# Altium PCB PCB1.PcbDoc
Units mm, origin at the board's own origin, x right, y up, seen from the top; angles counter-clockwise.
Board outline 65.91 x 43.31 mm, 2 copper layers (Top Layer, Bottom Layer); 32 components, 60 nets, 227 pads, 68 vias.
Unrouted connection lines stored in the file: 41.
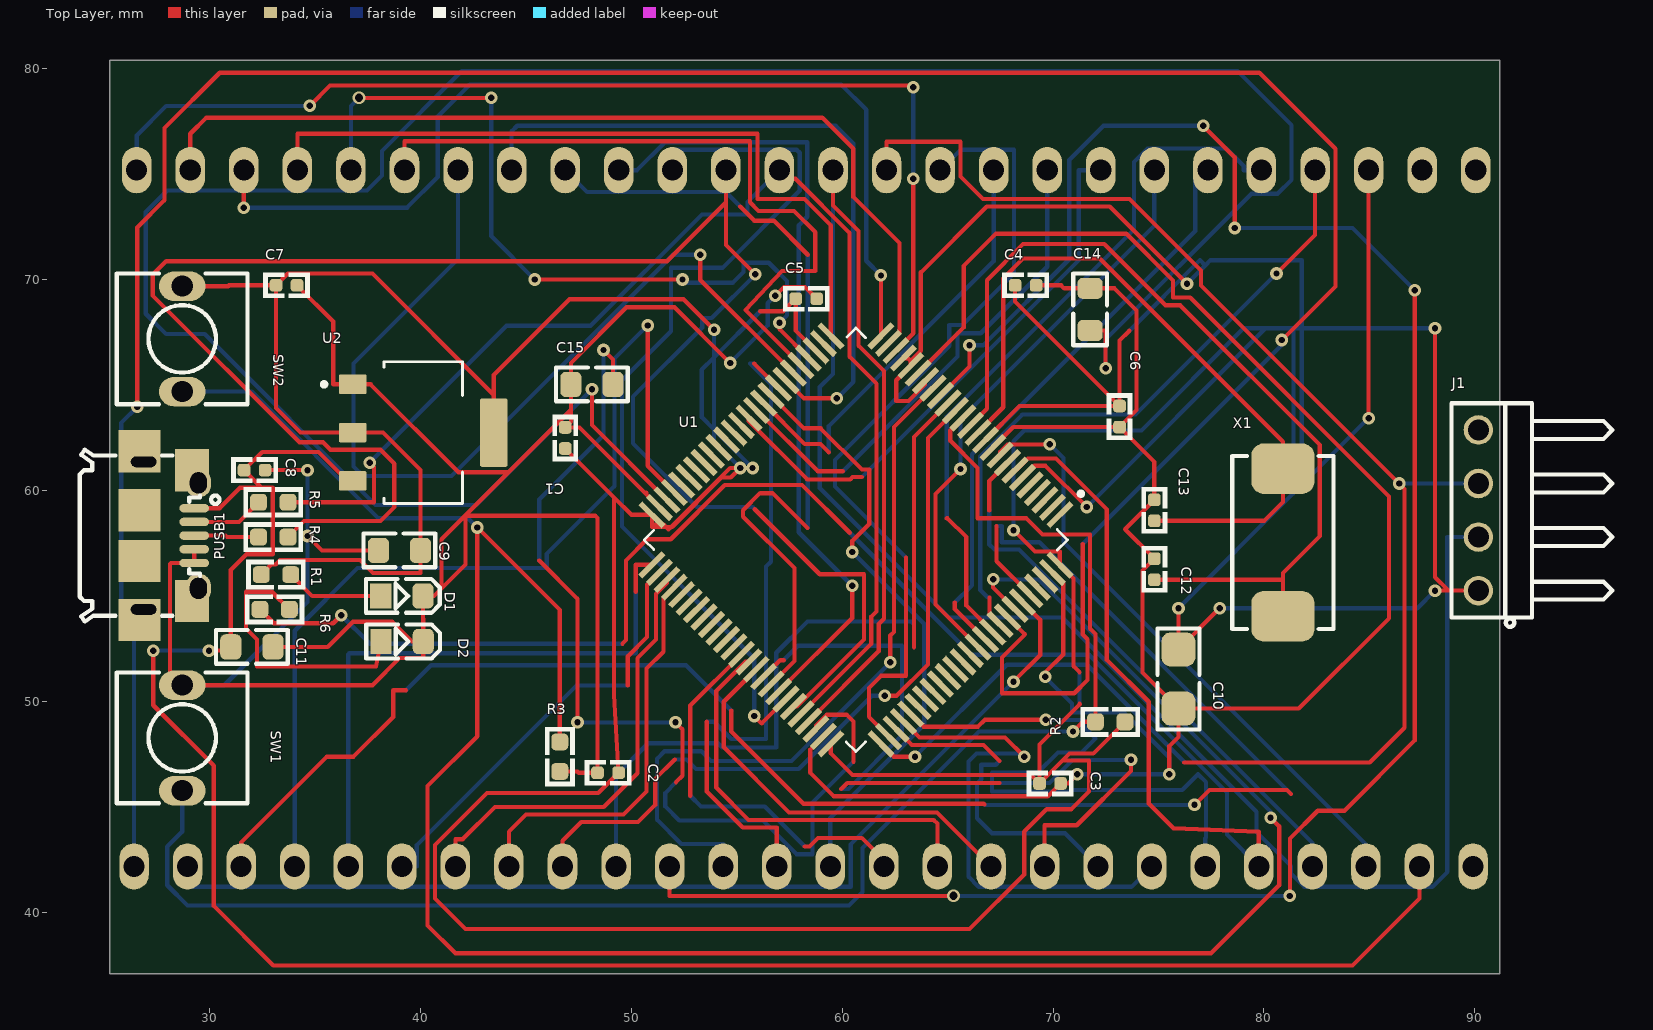
[diagram p0: Top Layer view]
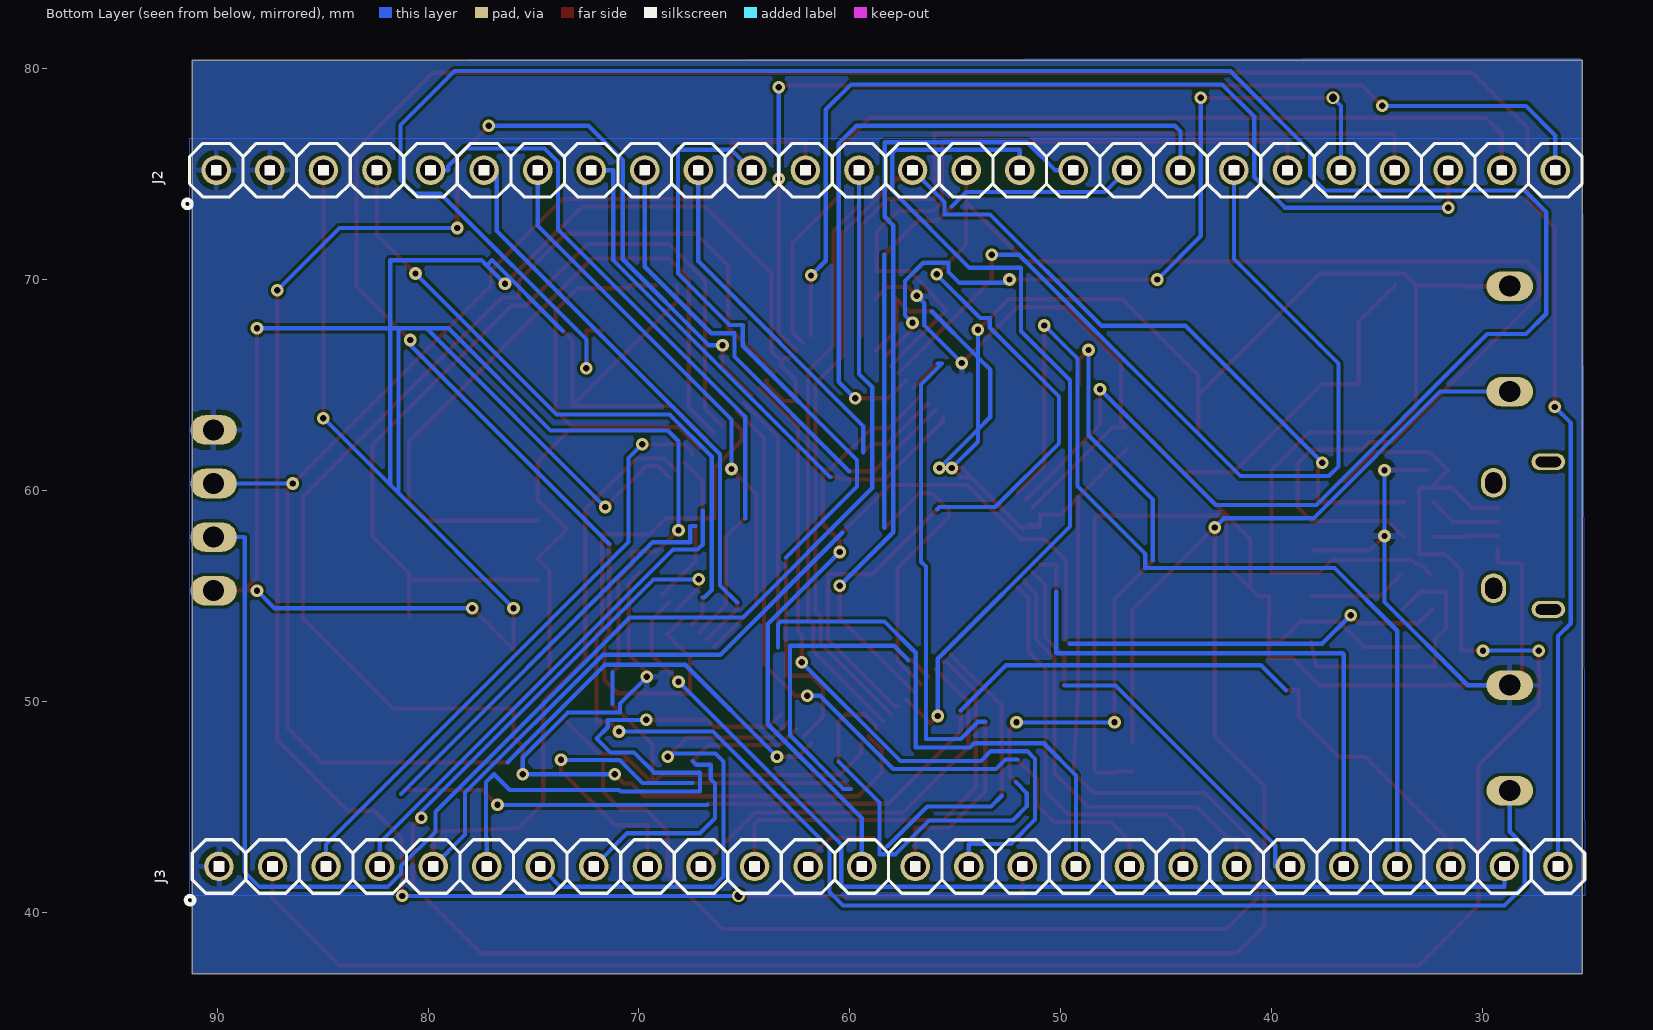
[diagram p1: Bottom Layer view, seen from below]

## Layer stack, top to bottom
Top Solder: solder mask 0.0102, Solder Resist, Dk 3.5
Top Layer: signal copper 0.0356
Dielectric 1: dielectric 0.32, FR-4, Dk 4.8
Bottom Layer: signal copper 0.0356
Bottom Solder: solder mask 0.0102, Solder Resist, Dk 3.5

## Board outline
25.273,37.084 25.273,80.391 91.186,80.391 91.186,37.084

## Design rules (kind name [scope] priority, off if disabled: settings)
Clearance [All] p1: gap=0.15 ignorepadtopadclearanceinfootprint=FALSE
PolygonConnect [All] p1: connectstyle=Relief reliefconductorwidth=0.254 reliefentries=4 polygonreliefangle="90 Angle" airgapwidth=0.254
RoutingVias [All] p1: holewidth=0.3 width=0.6 viastyle="Through Hole" minholewidth=0.3 minwidth=0.6 maxholewidth=0.3 maxwidth=0.6
RoutingVias Signals [All] p2: holewidth=0.3 width=0.6 viastyle="Through Hole" minholewidth=0.3 minwidth=0.6 maxholewidth=0.3 maxwidth=0.6
RoutingVias 3V3/5V [All] p3: holewidth=0.4 width=0.6 viastyle="Through Hole" minholewidth=0.4 minwidth=0.6 maxholewidth=0.4 maxwidth=0.6
SolderMaskExpansion [All] p1: expansion=0.102 istentingtop=FALSE
SupplyNets "Schematic Supply Nets_2" [InNet('3V3')] p1: voltage=0.000
SupplyNets "Schematic Supply Nets_1" [InNet('GND')] p2: voltage=0.000
SupplyNets "Schematic Supply Nets" [InNet('+5')] p3: voltage=0.000
Width Width_1 [All] p1: maxlimit=0.5 minlimit=0.15 preferedwidth=0.2
Width 5V [All] p2: maxlimit=1 minlimit=0.3 preferedwidth=0.6
Width SWD/PWM/SPI/SWCLK [All] p3: maxlimit=0.254 minlimit=0.2 preferedwidth=0.254
Width 3V3 [All] p4: maxlimit=0.5 minlimit=0.5 preferedwidth=0.5
Width Signal [All] p5: maxlimit=0.254 minlimit=0.15 preferedwidth=0.254
Width [All] p6: maxlimit=0.254 minlimit=0.254 preferedwidth=0.254
30 further rules are at their usual default settings.

## Components (designator, comment, footprint, x,y, rotation, side; value= is the part's Value field where it differs from the comment)
C1 "0.1uF" C0402 46.863,62.484 r90 top
C2 "0.1uF" C0402 48.895,46.609 r180 top
C3 "0.1uF" C0402 69.858,46.101 r0 top
C4 "0.1uF" C0402 68.699,69.723 r0 top
C5 "0.1uF" C0402 58.293,69.088 r0 top
C6 "0.1uF" C0402 73.152,63.5 r270 top
C7 "0.1uF" C0402 33.647,69.723 r0 top
C8 "0.1uF" C0402 32.131,60.96 r0 top
C9 "10uF" C0805 39.005,57.15 r0 top
C10 "4.7uF" C1206 75.946,51.054 r90 top
C11 "10uF" C0805 32.004,52.578 r180 top
C12 "22pF" C0402 74.803,56.261 r270 top
C13 "22pF" C0402 74.803,59.055 r270 top
C14 "2.2uF" C0805 71.755,68.58 r270 top
C15 "2.2uF" C0805 48.133,65.024 r0 top
D1 "LED805RED" LED0805RED 39.116,54.991 r0 top
D2 "LED805BLU" LED0805BLU 39.132,52.832 r0 top
J1 "HDR1X4" HDRR_M_1X4 90.17,59.055 r90 top value=HDRM4
J2 "HDRF26" HDR_M_1X26 58.293,75.184 r180 bottom
J3 "HDRF26" HDR_M_1X26 58.166,42.164 r180 bottom
PUSB1 "CONN_USB_MICROB" USB_MICRO_B_BM_SHT 29.27,57.855 r90 top
R1 "10K" R0603 33.147,56.007 r0 top
R2 "10K" R0603 72.709,49.022 r180 top
R3 "100K" R0603 46.609,47.371 r90 top
R4 "22" R0603 33.02,57.785 r180 top
R5 "22" R0603 33.02,59.436 r180 top
R6 "10K" R0603 33.085,54.356 r180 top
SW1 "PUSHBUTTON" SWPBT_SPST_6X6X4 28.702,48.26 r270 top
SW2 "PUSHBUTTON" SWPBT_SPST_6X6X4 28.702,67.183 r90 top
U1 "STM32F411VET6" QFP50P1600X1600X160-100N 60.648,57.655 r225 top
U2 "AMS1117" SOT229P700X180-4N 40.132,62.738 r0 top
X1 "XTL_8MHz" XTL_2_8045 80.899,57.531 r270 top

## Footprints (in the part's own frame and the unit in brackets; to place one, negate y for a bottom-side part, rotate by r counter-clockwise, add the part's x,y. Pads: shape width x height; smd on the part's side, far side on the other; paste and mask are expansions set on the pad)
C0402 [mm] "CHIP Capacitor, 1.0X0.5mm, 0402"
  rrect50% 0.6x0.6 smd paste-1 mask+0.05: 1(-0.5,0) 2(0.5,0)
  silkscreen extent -1.1,-0.6 1.1,0.6, body extent -0.5,-0.26 0.5,0.27, height 0.36
C0805 [mm] "CHIP Capacitor, 2.0X1.3mm, 0805"
  rrect50% 1x1.2 smd paste-0.1 mask+0.075: 1(-1,0) 2(1,0)
  Top Layer pour cut-out: -0.5,0.8 0.5,0.8 0.5,-0.8 -0.5,-0.8
  silkscreen extent -1.7,-0.8 1.7,0.8, body extent -1,-0.62 1,0.63, height 1
C1206 [mm] "CHIP Capacitor, 3.2X1.6mm, 1206"
  rrect50% 1.6x1.6 smd paste-0.8 mask+0.075: 1(-1.4,0) 2(1.4,0)
  Top Layer pour cut-out: -0.8,1 -0.8,-1 0.8,-1 0.8,1
  silkscreen extent -2.4,-1 2.4,1, body extent -1.6,-0.8 1.6,0.8, height 1
HDR_M_1X26 [mm] "Connector; Header; 26 Position"
  round 1.4 / inner round 1.4 / far side oval 1.4x2.2 hole 1: 1(-31.75,0) 2(-29.21,0) 3(-26.67,0) 4(-24.13,0) 5(-21.59,0) 6(-19.05,0) 7(-16.51,0) 8(-13.97,0) 9(-11.43,0) 10(-8.89,0) 11(-6.35,0) 12(-3.81,0) 13(-1.27,0) 14(1.27,0) 15(3.81,0) 16(6.35,0) 17(8.89,0) 18(11.43,0) 19(13.97,0) 20(16.51,0) 21(19.05,0) 22(21.59,0) 23(24.13,0) 24(26.67,0) 25(29.21,0) 26(31.75,0)
  silkscreen extent -33.32,-1.8 33.02,1.27, body extent -32.99,-1.27 33.05,1.27, height 8.54
HDRR_M_1X4 [mm] "Connector; Header; 4 Position; Right Angle"
  round 1.4 / inner round 1.4 / far side oval 1.4x2.2 hole 1: 1(-3.81,0) 2(-1.27,0) 3(1.27,0) 4(3.81,0)
  silkscreen extent -5.53,-6.35 5.08,1.27, body extent -5.08,-7.35 5.08,1.27, height 5.45
LED0805BLU [mm] "LED SMD 0805, BLUE"
  rect 1x1.2 smd paste-2 mask+0.075: 1(-1,0)
  rrect50% 1x1.2 smd paste-2 mask+0.075: 2(1,0)
  Top Layer pour cut-out: -0.5,0.8 0.5,0.8 0.5,-0.8 -0.5,-0.8
  silkscreen extent -1.7,-0.8 1.8,0.8, body extent -1,-0.63 1,0.63, height 0.7
LED0805RED [mm] "LED SMD 0805, RED"
  rect 1x1.2 smd paste-2 mask+0.075: 1(-1,0)
  rrect50% 1x1.2 smd paste-2 mask+0.075: 2(1,0)
  Top Layer pour cut-out: -0.5,0.8 0.5,0.8 0.5,-0.8 -0.5,-0.8
  silkscreen extent -1.7,-0.8 1.8,0.8, body extent -1,-0.63 1,0.63, height 0.7
QFP50P1600X1600X160-100N [mm]
  rrect7% 1.56x0.28 smd paste+0 mask+0.102: 1(-7.68,6) 2(-7.68,5.5) 3(-7.68,5) 4(-7.68,4.5) 5(-7.68,4) 6(-7.68,3.5) 7(-7.68,3) 8(-7.68,2.5) 9(-7.68,2) 10(-7.68,1.5) 11(-7.68,1) 12(-7.68,0.5) 13(-7.68,0) 14(-7.68,-0.5) 15(-7.68,-1) 16(-7.68,-1.5) 17(-7.68,-2) 18(-7.68,-2.5) 19(-7.68,-3) 20(-7.68,-3.5) 21(-7.68,-4) 22(-7.68,-4.5) 23(-7.68,-5) 24(-7.68,-5.5) 25(-7.68,-6) 51(7.68,-6) 52(7.68,-5.5) 53(7.68,-5) 54(7.68,-4.5) 55(7.68,-4) 56(7.68,-3.5) 57(7.68,-3) 58(7.68,-2.5) 59(7.68,-2) 60(7.68,-1.5) 61(7.68,-1) 62(7.68,-0.5) 63(7.68,0) 64(7.68,0.5) 65(7.68,1) 66(7.68,1.5) 67(7.68,2) 68(7.68,2.5) 69(7.68,3) 70(7.68,3.5) 71(7.68,4) 72(7.68,4.5) 73(7.68,5) 74(7.68,5.5) 75(7.68,6)
  rrect7% 0.28x1.56 smd paste+0 mask+0.102: 26(-6,-7.68) 27(-5.5,-7.68) 28(-5,-7.68) 29(-4.5,-7.68) 30(-4,-7.68) 31(-3.5,-7.68) 32(-3,-7.68) 33(-2.5,-7.68) 34(-2,-7.68) 35(-1.5,-7.68) 36(-1,-7.68) 37(-0.5,-7.68) 38(0,-7.68) 39(0.5,-7.68) 40(1,-7.68) 41(1.5,-7.68) 42(2,-7.68) 43(2.5,-7.68) 44(3,-7.68) 45(3.5,-7.68) 46(4,-7.68) 47(4.5,-7.68) 48(5,-7.68) 49(5.5,-7.68) 50(6,-7.68) 76(6,7.68) 77(5.5,7.68) 78(5,7.68) 79(4.5,7.68) 80(4,7.68) 81(3.5,7.68) 82(3,7.68) 83(2.5,7.68) 84(2,7.68) 85(1.5,7.68) 86(1,7.68) 87(0.5,7.68) 88(0,7.68) 89(-0.5,7.68) 90(-1,7.68) 91(-1.5,7.68) 92(-2,7.68) 93(-2.5,7.68) 94(-3,7.68) 95(-3.5,7.68) 96(-4,7.68) 97(-4.5,7.68) 98(-5,7.68) 99(-5.5,7.68) 100(-6,7.68)
  silkscreen extent -9.19,-7.1 7.1,7.1, body extent -8,-8 8,8, height 1.6
R0603 [mm] "CHIP Resistor 1/10 WATT, 1.6x0.8mm, 0603, OPTIMIZED"
  rrect50% 0.8x0.8 smd paste-5 mask+0.075: 1(-0.7,0) 2(0.7,0)
  Top Layer pour cut-out: -0.5,0.4 0.5,0.4 0.5,-0.4 -0.5,-0.4
  silkscreen extent -1.4,-0.7 1.4,0.7, body extent -0.85,-0.4 0.85,0.4, height 0.56
SOT229P700X180-4N [mm]
  rrect15% 1.31x0.93 smd: 1(-3.345,2.29) 2(-3.345,0) 3(-3.345,-2.29)
  rrect15% 1.31x3.24 smd: 4(3.345,0)
  silkscreen extent -4.8,-3.36 1.86,3.36, body extent -3.25,-3.5 3.25,3.5, height 1.8
SWPBT_SPST_6X6X4 [mm] "SWITCH, PUSHBUTTON, THD, SPST, 6X6mm"
  oval 1.4x2.2 hole 1 mask+0.1: 1(-2.5,0) 2(2.5,0)
  silkscreen extent -3.1,-3.1 3.1,3.1, body extent -3,-3 3,3.2, height 4.3
USB_MICRO_B_BM_SHT [mm] "CONN, USB Micro AB - Standard (Bottom mount), Shell SMT"
  oval 0.4x1.4 smd: 1(1.3,0) 2(0.65,0) 3(0,0) 4(-0.65,0) 5(-1.3,0)
  rect 2x1.6 smd: SH1(-3.1,0.1) SH6(3.1,0.1)
  rect 2x2 smd: SH2(-4,2.6) SH3(-1.2,2.6) SH4(1.2,2.6) SH5(4,2.6)
  oval 1.4x1.2 hole 0.8 slot 1 at 0 deg mask+0.05: SH7(-2.5,-0.2) SH8(2.5,-0.2)
  oval 0.8x1.6 hole 0.5 slot 1.2 at 90 deg: SH9(-3.5,2.4) SH10(3.5,2.4)
  silkscreen extent -4.08,-1.2 4.08,5.43, body extent -4.1,-0.45 4.1,4.98, height 2.68
XTL_2_8045 [mm] "ABM2 8.0X4.5x1.4mm"
  rrect50% 2.4x3 smd: 1(-3.5,0) 2(3.5,0)
  Top Layer pour cut-out: -3.5,-2.3 3.5,-2.3 3.5,2.3 -3.5,2.3
  silkscreen extent -4.1,-2.4 4.1,2.4, body extent -4,-2.25 4,2.25, height 1.4

## Part data
C1 C2 C3 C4 C5 C6 C7 C8: library part CAP_SMD_MLCC_100n50T, "CAP, MLCC, 100nF, 50V, X5R, 10%, 0402C", ASSEMBLY=ASSEMBLY, MANF="Taiyo Yuden", MANF_P#=UMK105BJ104KV-F, PARAM="X5R, 10%, -55~85oC", PARAM2=50V, PRICE="100= 3.8$"
C9 C11: library part CAP_SMD_MLCC_10u25V, "CAP, MLCC, X5R 10uF 10% 25V 0805", MANF="Taiyo Yuden", MANF_P#=TMK212BBJ106MG, PARAM="X5R, 10%", PARAM2=25V, PRICE=100=6$
C10: library part CAP_SMD_MLCC_4.7u50V, "CAP, MLCC, SMD", ASSEMBLY=ASSEMBLY, DESC="CAP, MLCC", DIST#=MOUSER, MANF="Taiyo Yuden", MANF_P#=UMK316BJ475KL-T, PARAM="X5R, 20%", PARAM2=50V, PRICE=0.4$
C12 C13: library part CAP_SMD_MLCC_22p50V, "CAP, MLCC, 50V, C0G, 2%", ASSEMBLY=ASSEMBLY, DESC="CAP, MLCC", DIST#=MOUSER, MANF=MURATA, MANF_P#=GRM1555C1H220GA01D, PARAM="C0G, 2%", PARAM2=50V, PRICE="100= 2.4$"
C14 C15: library part CAP_SMD_MLCC_2.2u50V_0805, "CAP, MLCC", ASSEMBLY=ASSEMBLY, DESC="CAP, MLCC", DIST#=MOUSER, MANF="Taiyo Yuden", MANF_P#=UMK212ABJ225KG-T, PARAM="X5R, 10%", PARAM2=50V, PRICE="100= 10$"
D1: library part LED_SMD_0805_RED, "LED, SMD, 0805, RED", ASSEMBLY=ASSEMBLY, DESC=DESCRIPTION, MANF=MANF, MANF_P#=MANF_PART#, PARAM2=2.2V, PRICE=36t@Javan
D2: library part LED_SMD_0805_BLU, "LED, SMD, 0805, BLUE", ASSEMBLY=ASSEMBLY, DESC=DESCRIPTION, MANF=MANF, MANF_P#=MANF_PART#, PARAM2=2.2V, PRICE=36t@Javan
J1: library part HDRR_M_1X4, "CONN, HEADER, RightAngle, Male, pitch: 2.54mm, 4POS"
J2 J3: library part HDR_M_1X26, "CONN, HEADER, Male, pitch: 2.54mm, 26POS"
PUSB1: library part CONN_USB_MICRO_B_BM_SHT, "CONN, USB, MICRO B, R/A, SMD, BOTTOM MOUNT, SHT", MANF=-, MANF_P#=-
R1 R2 R3 R4 R5 R6: library part RES_SMD_0603, "RESISTOR, SMD", ASSEMBLY=ASSEMBLY, DESC=DESCRIPTION, DIST#=MOUSER, MANF=-, MANF_P#=-, PARAM="1%, 0.1W", PARAM2=-, PRICE=-
SW1 SW2: library part SWPBT_SPST_6X6X4, "SWITCH, PUSH BUTTON, TACTILE, THD, SPST, 6X6X4mm", ASSEMBLY=ASSEMBLY, DESC=DESCRIPTION, MANF=-, MANF_P#=-, PARAM=PARAM, PRICE=PRICE
U1: "Mcu, 32Bit, 100Mhz, Lqfp-100; Product Range:Stm32 Family Stm32F4 Series Microcontrollers; Device Core:Arm Cortex-M4; Data Bus Width:32 Bit; Operating Frequency Max:100Mhz; Program Memory Size:512Kb; No. Of Pins:100Pins Rohs Compliant: Yes", Package=None, Check_prices=https://www.snapeda.com/parts/STM32F411VET6./STMicroelectronics/view-part/?ref=eda, MF=STMicroelectronics, MP=STM32F411VET6., SnapEDA_Link=https://www.snapeda.com/parts/STM32F411VET6./STMicroelectronics/view-part/?ref=snap
U2: "1A LOW DROPOUT VOLTAGE REGULATOR SOT-223", Package="SOT-223 Seeed Technology", Check_prices=https://www.snapeda.com/parts/AMS1117/Advanced+Monolithic+Systems/view-part/?ref=eda, MF="Advanced Monolithic Systems", MP=AMS1117, SnapEDA_Link=https://www.snapeda.com/parts/AMS1117/Advanced+Monolithic+Systems/view-part/?ref=snap
X1: library part XTL_2_8MHz_ABM2, "Crystal 2", ASSEMBLY=ASSEMBLY, MANF=ABRACON, MANF_P#=ABM2-8.000MHZ-D4Y-T, PARAM=30PPM, PARAM2=18PF, PRICE=0.73$

## Via types
v1: diameter 0.6, hole 0.3, Top Layer to Bottom Layer, 66 vias
v2: diameter 0.6, hole 0.4, Top Layer to Bottom Layer, 2 vias

## Nets (pads, with @x,y where several pads share a name; then routed paths per layer and width w, separated by ;. In a path a pad name is that pad's centre, name@x,y a point inside that pad or via, vN(x,y) a via of type N, cw(c..) or ccw(c..) an arc to the next point about the centre after c; other vN are vias at no path point)
3V3: C1.1 C2.1 C3.1 C4.1 C5.1 C6.1 C7.1 C9.2 C10.2 J1.1 J2.3 R1.1 R2.1 SW2.2 U1.6 U1.11 U1.19 U1.21 U1.22 U1.28 U1.50 U1.75 U1.100 U2.2 U2.4 | length 362.8
  Top Layer w0.2: SW2.2 30.886,69.683 30.926,69.723 C7.1 ; R1.1 32.921,56.481 33.133,56.481 33.345,56.693 37.135,56.693 37.744,56.083 40.005,56.083 C9.2 40.005,60.96 38.227,62.738 U2.2 34.315,62.738 33.147,63.906 C7.1 ; U2.4 43.477,64.524 ; C1.1 49.183,59.664 ; v1(53.924,67.615) 52.476,69.063 47.066,69.063 43.477,65.473 43.477,64.524 ; v1(55.75,61.062) v1(55.169,61.062) ; 56.112,68.495 57.2,68.495 C5.1 57.793,67.581 U1.28 ; U1.75 59.46,47.529 60.482,46.507 68.952,46.507 C3.1 ; U1.22 63.124,66.268 63.25,66.142 ; U1.19 63.921,65.207 63.921,65.015 63.143,64.237 62.56,64.237 62.56,65.224 U1.21 63.25,66.142 ; U1.11 68.407,64 C6.1 ; v1(68.123,58.115) 69.139,57.099 70.321,57.099 U1.100 70.968,55.821 70.968,51.663 71.253,51.378 ; C4.1 68.199,68.953 C6.1 ; U1.6 69.106,61.163 69.647,61.163 v1(71.603,59.207) ; 71.253,49.879 71.272,49.86 69.358,47.946 C3.1 ; R2.1 71.91,47.523 70.78,47.523 70.45,47.193 ; 73.61,67.565 73.152,67.107 C6.1 ; v1(75.946,54.407) C10.2 v1(77.899,54.407) ; v1(76.352,69.799) 72.689,73.462 66.853,73.462 63.729,70.338 63.729,66.62 63.25,66.142 ; v1(84.963,63.424) J2.3 ; v1(88.113,55.245) 88.748,55.245 ; v1(88.113,67.691) 88.113,55.88 88.748,55.245 ; J1.1 88.748,55.245 ; C7.1 33.706,70.282 37.719,70.282 43.477,64.524 ; 49.183,59.664 50.004,58.843 U1.50 50.975,58.369 ; 49.183,59.664 49.183,50.309 C2.1 48.43,45.644 43.155,45.644 40.691,43.18 40.691,40.64 42.139,39.192 66.04,39.192 68.631,41.783 68.631,43.815 69.698,44.882 70.866,44.882 71.704,45.72 71.704,47.193 70.45,47.193 ; 50.975,58.369 50.975,58.268 51.638,58.268 ; 50.975,58.369 51.537,58.369 51.638,58.268 ; 51.638,58.268 51.765,58.141 51.892,58.268 ; 51.638,58.268 51.892,58.268 ; 51.892,58.268 54.686,61.062 v1(55.169,61.062) ; 51.892,58.268 51.943,58.268 54.28,60.604 54.712,60.604 v1(55.169,61.062) ; C3.1 70.45,47.193
  Bottom Layer w0.2: v1(53.924,67.615) 53.924,66.308 ; v1(55.169,61.062) 53.924,62.306 53.924,62.887 ; v1(55.75,61.062) 53.924,62.887 ; 56.112,68.495 53.924,66.308 ; v1(68.123,58.115) 68.123,62.332 68.631,62.84 74.193,62.84 79.045,67.691 80.086,67.691 ; 71.253,49.879 71.253,51.378 ; v1(71.603,59.207) 80.086,67.691 ; 73.61,67.565 76.962,70.917 77.216,70.663 ; v1(75.946,54.407) 81.407,59.868 ; v1(76.352,69.799) 77.216,70.663 ; v1(77.899,54.407) 87.274,54.407 v1(88.113,55.245) ; v1(84.963,63.424) 81.788,60.249 ; v1(88.113,67.691) 81.788,67.691 ; 53.924,62.887 53.924,66.308 ; 53.924,62.887 53.34,63.471 53.34,65.724 53.924,66.308 ; 77.216,70.663 77.47,70.917 81.788,70.917 81.788,67.691 ; 80.086,67.691 81.407,67.691 ; 81.407,59.868 81.788,60.249 ; 81.407,59.868 81.407,67.691 ; 81.407,67.691 81.788,67.691 ; 81.788,60.249 81.788,67.691
+5: C8.1 C11.2 J3.2 PUSB1.1 U2.3 | length 98.8
  Top Layer w0.2: v1(27.33,52.4) 27.33,49.809 30.201,46.939 30.201,40.284 33.02,37.465 84.201,37.465 87.376,40.64 J3.2 ; PUSB1.1 30.48,59.155 31.447,60.122 32.469,60.122 ; v1(29.972,52.4) 31.004,52.4 C11.2 31.004,56.226 31.75,56.972 32.995,56.972 32.995,60.122 32.469,60.122 ; U2.3 36.535,60.448 35.159,61.824 32.495,61.824 C8.1 32.469,60.122
  Bottom Layer w0.2: v1(27.33,52.4) v1(29.972,52.4)
GND: C1.2 C2.2 C3.2 C4.2 C5.2 C6.2 C7.2 C8.2 C9.1 C10.1 C11.1 C12.1 C13.1 C14.1 C15.1 D1.2 D2.2 J1.4 J2.1 J2.2 J3.1 PUSB1.4 PUSB1.5 R3.1 SW1.1 U1.10 U1.20 U1.27 U1.49 U1.74 U1.99 U2.1 | length 248.5
  Top Layer w0.2: PUSB1.4 PUSB1.5 28.169,56.555 28.118,56.504 28.118,50.76 SW1.1 37.719,50.76 39.004,52.045 40.132,52.045 D2.2 ; C8.2 v1(34.646,60.96) ; C11.1 35.602,52.578 36.796,53.772 38.659,53.772 39.599,52.832 D2.2 ; C7.2 35.865,68.005 35.865,65.028 U2.1 37.639,65.028 41.808,60.858 44.171,60.858 ; v1(34.646,57.836) 35.331,57.15 C9.1 ; R3.1 47.447,46.671 47.509,46.609 C2.2 48.395,58.691 48.285,58.801 42.139,58.801 42.139,56.49 40.996,55.347 ; 50.703,59.882 50.703,59.822 ; U1.49 50.703,59.822 ; v1(54.686,66.04) 52.045,68.682 49.775,68.682 47.133,66.04 C15.1 47.133,63.821 ; v1(56.818,69.224) 57.24,69.647 58.234,69.647 C5.2 ; U1.74 58.488,47.717 58.488,46.605 59.603,45.49 69.747,45.49 C3.2 70.714,46.101 v1(71.145,46.533) ; U1.20 65.761,67.717 65.761,70.637 67.295,72.172 73.471,72.172 75.688,69.956 75.688,69.14 76.504,69.14 85.928,59.715 85.928,53.931 81.651,49.654 C10.1 ; U1.10 68.114,63 C6.2 ; C4.2 70.383,69.723 70.526,69.58 C14.1 72.91,69.58 73.96,68.529 73.96,63.809 C6.2 ; v1(69.621,51.156) 69.621,51.359 70.485,52.222 70.485,55.596 U1.99 ; v1(75.514,46.533) 75.514,47.879 75.946,48.311 C10.1 ; D2.2 40.132,53.899 40.116,53.915 D1.2 40.64,54.991 40.996,55.347 ; 40.996,55.347 40.996,57.683 44.171,60.858 ; 44.171,60.858 46.58,63.267 47.133,63.821 ; 47.133,63.821 47.133,63.254 C1.2 47.541,62.984 50.703,59.822 ; C6.2 74.803,61.349 C13.1 73.406,58.158 C12.1 74.244,56.202 74.244,51.356 C10.1
  Bottom Layer w0.2: SW1.1 30.694,50.76 34.646,54.712 v1(34.646,57.836) v1(34.646,60.96) ; v1(54.686,66.04) 56.464,67.818 56.464,68.871 v1(56.818,69.224) ; v1(69.621,51.156) 70.891,49.886 70.891,49.465 73.37,49.465 75.514,47.321 v1(75.514,46.533) v1(71.145,46.533)
NetC12_2: C12.2 U1.13 X1.2 | length 42.6
  Top Layer w0.2: U1.13 66.865,63.872 66.865,69.964 68.58,71.679 72.427,71.679 75.327,68.779 76.027,68.779 82.652,62.154 82.652,57.836 80.899,56.083 80.899,55.761 ; C12.2 80.899,55.761 ; X1.2 80.899,55.761
NetC13_2: C13.2 U1.12 X1.1 | length 34.4
  Top Layer w0.2: U1.12 67.64,63.94 67.64,70.053 68.58,70.993 72.212,70.993 80.899,62.306 X1.1 80.899,59.444 80.01,58.555 C13.2
NetC14_2: C14.2 U1.48 | length 116
  Top Layer w0.2: v1(48.133,64.795) 48.133,63.099 U1.48 ; C14.2 72.492,67.58 v1(72.492,65.786)
  Bottom Layer w0.2: v1(48.133,64.795) 42.647,59.309 37.871,59.309 29.769,67.412 27.94,67.412 26.975,68.377 26.975,73.203 27.991,74.219 37.465,74.219 38.176,74.93 38.176,76.098 41.961,79.883 78.74,79.883 81.305,77.318 81.305,74.727 80.645,74.066 79.412,74.066 72.492,67.146 v1(72.492,65.786)
NetC15_2: C15.2 U1.73 | length 47.9
  Top Layer w0.2: 45.635,56.669 47.447,54.856 v1(47.447,48.997) ; v1(48.683,66.657) 49.133,66.207 C15.2 ; v1(52.095,48.997) 52.426,48.666 52.426,46.464 52.123,46.161 ; U1.73 58.753,48.844 59.264,49.355 60.221,49.355 60.533,49.042 60.533,47.135
  Bottom Layer w0.2: 45.635,56.669 45.635,59.563 48.683,62.611 v1(48.683,66.657) ; v1(47.447,48.997) v1(52.095,48.997) ; 52.123,46.161 51.613,45.651 51.613,45.009 52.273,44.348 56.236,44.348 57.836,42.748 58.598,42.748 58.598,45.199 60.533,47.135
NetD1_1: D1.1 R1.2 | length 4.7
  Top Layer w0.2: R1.2 34.863,54.991 D1.1
NetD2_1: D2.1 R6.1 | length 13
  Top Layer w0.2: R6.1 32.947,55.194 31.725,55.194 31.725,53.442 32.245,52.921 32.245,51.651 37.895,51.651 D2.1
NetJ1_2: J1.2 J2.13 U1.72 | length 100
  Top Layer w0.2: U1.72 61.731,52.374 61.731,53.661 61.981,53.912 61.981,65.654 60.773,66.862 60.773,72.297 59.563,73.508 J2.13
  Bottom Layer w0.2: J2.13 59.563,65.523 58.937,64.897 58.937,60.106 65.067,53.976 70.433,53.976 79.651,44.758 79.651,43.806 81.28,42.177 81.28,41.834 81.915,41.199 87.986,41.199 88.697,41.91 88.697,57.785 J1.2
NetJ1_3: J1.3 J2.12 U1.76 | length 78.7
  Top Layer w0.2: U1.76 62.447,47.371 v1(63.449,47.371) ; J2.12 62.103,76.534 65.608,76.534 65.608,74.879 66.675,73.812 73.623,73.812 77.016,70.42 77.016,69.72 v1(86.411,60.325) 86.665,60.071 86.665,48.743 85.018,47.096 76.219,47.096
  Bottom Layer w0.2: v1(63.449,47.371) 67.806,51.728 71.603,51.728 76.219,47.111 76.219,47.096 ; v1(86.411,60.325) 86.665,60.325 J1.3
NetJ2_4: J2.4 U1.92 | length 31.7
  Top Layer w0.2: 66.98,54.915 66.98,54.152 U1.92 ; v1(80.594,70.282) 82.423,72.111 J2.4
  Bottom Layer w0.2: 66.98,54.915 66.904,54.915 66.548,55.27 66.548,61.608 68.542,63.602 73.914,63.602 v1(80.594,70.282)
NetJ2_5: J2.5 U1.91 | length 33.7
  Top Layer w0.2: 64.963,58.67 64.967,58.674 64.999,58.674 65.888,57.785 65.888,54.537 U1.91
  Bottom Layer w0.2: 64.963,58.67 64.963,63.5 73.838,72.375 73.838,75.565 74.483,76.211 78.221,76.211 79.045,75.387 79.045,75.184 J2.5
NetJ2_6: J2.6 U1.90 | length 28.2
  Top Layer w0.2: 65.338,54.676 65.338,54.379 U1.90
  Bottom Layer w0.2: 65.338,54.676 66.158,55.496 66.158,61.713 76.743,72.298 76.743,75.184 J2.6
NetJ2_7: J2.7 U1.89 | length 27.7
  Top Layer w0.2: v1(65.608,61.011) 64.422,59.825 64.422,54.588 U1.89
  Bottom Layer w0.2: v1(65.608,61.011) 65.608,63.361 74.803,72.556 J2.7
NetJ2_8: J2.8 U1.37 | length 26.6
  Top Layer w0.2: U1.37 55.571,63.292 58.346,60.517 60.38,60.517 60.493,60.63 60.931,60.63
  Bottom Layer w0.2: 60.931,60.63 71.222,70.92 71.222,75.184 J2.8
NetJ2_9: J2.9 U1.36 | length 24.2
  Top Layer w0.2: U1.36 55.961,63.793 58.845,60.909 60.03,60.909
  Bottom Layer w0.2: 60.03,60.909 65.47,66.349 65.47,67.448 66.569,67.448 69.723,70.602 J2.9
NetJ2_10: J2.10 U1.35 | length 20.7
  Top Layer w0.2: U1.35 58.22,62.205 58.965,62.205 59.366,61.804
  Bottom Layer w0.2: 59.366,61.804 59.366,63.049 67.183,70.866 J2.10
NetJ2_11: J2.11 U1.77 | length 38.8
  Top Layer w0.2: U1.77 61.265,49.26 61.265,50.622 61.846,51.204 63.028,51.204 63.028,56.813
  Bottom Layer w0.2: 63.028,56.813 59.665,60.177 59.665,61.443 65.078,66.856 65.078,67.84 65.707,67.84 68.148,70.281 68.148,76.149 65.608,76.149 J2.11
NetJ2_14: J2.14 R5.1 U1.71 | length 61.2
  Top Layer w0.2: R5.1 37.795,59.436 37.795,61.112 v1(37.592,61.316) ; J2.14 57.023,74.778 57.785,74.778 60.35,72.212 60.35,66.339 61.631,65.059 61.631,54.262 61.381,54.011 61.381,52.731 U1.71
  Bottom Layer w0.2: v1(37.592,61.316) 44.082,67.806 48.07,67.806 53.348,73.084 55.514,73.084 55.514,73.675 J2.14
NetJ2_15: J2.15 R4.1 U1.70 | length 89.5
  Top Layer w0.2: R4.1 34.482,58.547 38.1,58.547 38.76,59.207 38.76,61.265 38.1,61.925 35.738,61.925 35.382,62.281 34.261,62.281 27.3,69.242 27.3,70.226 27.94,70.866 51.689,70.866 54.483,73.66 ; J2.15 54.483,73.66 ; 55.855,59.106 58.937,56.024 61.027,56.024 61.027,52.929 57.848,49.75 U1.70 ; v1(55.88,70.242) 54.483,71.639 54.483,73.66
  Bottom Layer w0.2: 55.855,59.106 55.753,59.207 53.104,59.207 50.082,62.23 50.082,64.444 53.363,67.726 53.363,68.178 53.816,68.178 v1(55.88,70.242)
NetJ2_16: J2.16 U1.69 | length 43.4
  Top Layer w0.2: v1(55.829,49.298) 56.182,48.946 U1.69
  Bottom Layer w0.2: J2.16 51.943,76.149 57.847,76.149 57.988,76.008 57.988,74.214 54.327,70.552 51.876,70.552 51.876,67.547 49.551,65.223 49.551,58.29 55.829,52.012 v1(55.829,49.298)
NetJ2_17: J2.17 U1.68 | length 38.2
  Top Layer w0.2: U1.68 60.477,53.949 v1(60.477,55.474)
  Bottom Layer w0.2: J2.17 50.267,75.184 51.587,76.505 58.344,76.505 58.344,72.974 57.937,72.568 57.937,58.014 v1(60.477,55.474)
NetJ2_18: J2.18 U1.67 | length 39.9
  Top Layer w0.2: 55.164,73.457 55.83,72.79 56.752,72.79 58.367,71.176 58.367,71.171 ; U1.67 57.734,51.913 57.734,56.312 55.296,58.75 55.296,59.055 56.109,59.868 56.699,59.868 58.35,58.217
  Bottom Layer w0.2: J2.18 47.904,74.143 54.478,74.143 55.164,73.457 ; 58.35,58.217 58.367,58.233 58.367,71.171
NetJ2_19: J2.19 U1.32 | length 33.7
  Top Layer w0.2: U1.32 58.182,64.364 v1(59.741,64.364)
  Bottom Layer w0.2: J2.19 44.323,77.026 44.589,77.292 59.69,77.292 60.528,76.454 60.528,65.151 v1(59.741,64.364)
NetJ2_20: J2.20 U1.31 | length 44.5
  Top Layer w0.2: v1(53.264,71.171) 53.264,69.989 U1.31
  Bottom Layer w0.2: J2.20 41.783,70.968 36.83,66.015 36.83,61.138 37.287,60.681 41.478,60.681 51.968,71.171 v1(53.264,71.171)
NetJ2_21: J2.21 U1.30 | length 34
  Top Layer w0.2: J2.21 39.243,76.556 55.626,76.556 55.626,73.66 56.032,73.254 57.709,73.254 58.725,72.238 58.725,70.409 57.15,70.409 55.412,68.548 U1.30
NetJ2_22: J2.22 U1.29 | length 36.7
  Top Layer w0.2: v2(37.084,78.613) v1(43.358,78.613) ; v1(45.415,70.002) v1(52.426,70.002) ; v1(57.023,67.945) 57.023,67.644 U1.29
  Bottom Layer w0.2: J2.22 36.703,78.232 v2(37.084,78.613) ; v1(43.358,78.613) 43.358,72.06 v1(45.415,70.002) ; v1(52.426,70.002) 52.578,69.85 54.813,69.85 55.321,70.358 55.321,70.792 56.515,70.792 57.379,69.929 57.379,68.301 v1(57.023,67.945)
NetJ2_23: J2.23 U1.26 | length 35.9
  Top Layer w0.2: J2.23 34.163,76.911 55.982,76.911 55.982,73.812 58.216,73.812 59.46,72.568 U1.26
NetJ2_24: J2.24 U1.25 | length 46.9
  Top Layer w0.2: v1(31.623,73.406) J2.24 ; U1.25 v1(61.836,70.193)
  Bottom Layer w0.2: v1(31.623,73.406) 39.37,73.406 40.818,74.854 40.818,77.724 42.342,79.248 59.944,79.248 61.138,78.054 61.138,70.891 v1(61.836,70.193)
NetJ2_25: J2.25 U1.24 | length 44.4
  Top Layer w0.2: J2.25 29.083,76.911 29.845,77.673 59.055,77.673 60.528,76.2 60.528,73.914 62.713,71.73 62.713,67.498 U1.24
NetJ2_26: J2.26 U1.23 | length 52.3
  Top Layer w0.2: v1(34.747,78.232) 35.712,79.197 63.297,79.197 v1(63.373,79.121) ; U1.23 63.373,67.451 v1(63.373,74.778)
  Bottom Layer w0.2: J2.26 26.543,76.835 27.94,78.232 v1(34.747,78.232) ; v1(63.373,74.778) v1(63.373,79.121)
NetJ3_3: J3.3 U1.9 | length 28.9
  Top Layer w0.2: U1.9 67.493,61.827 67.845,62.179 v1(69.85,62.179)
  Bottom Layer w0.2: v1(69.85,62.179) 70.495,61.534 70.495,57.552 84.836,43.212 J3.3
NetJ3_4: J3.4 U1.8 | length 26.6
  Top Layer w0.2: 66.972,59.047 66.972,60.443 U1.8
  Bottom Layer w0.2: 66.972,59.047 66.972,57.434 67.216,57.19 68.388,57.19 82.296,43.282 J3.4
NetJ3_5: J3.5 R6.2 U1.7 | length 90.1
  Top Layer w0.2: R6.2 33.045,53.696 35.865,53.696 v1(36.246,54.077) ; 49.578,52.73 49.745,52.898 49.745,56.679 50.749,57.683 51.867,57.683 54.432,60.249 58.096,60.249 60.357,57.988 ; U1.7 68.254,60.964 68.805,61.516 70.133,61.516 72.55,59.098 72.55,51.961 74.538,49.973 74.538,45.147 75.709,43.976 79.756,43.815 J3.5
  Bottom Layer w0.2: v1(36.246,54.077) 37.592,52.73 49.578,52.73 ; 60.357,57.988 66.145,52.2 71.714,52.2 78.242,45.672 78.242,43.678 J3.5
NetJ3_6: J3.6 U1.80 | length 30.8
  Top Layer w0.2: U1.80 63.853,48.793 66.446,48.793 66.777,49.124 v1(69.647,49.124)
  Bottom Layer w0.2: v1(69.647,49.124) 69.656,49.115 71.476,49.115 71.476,48.768 72.009,48.235 71.349,47.574 70.231,47.574 69.266,46.609 67.107,46.609 67.107,45.72 70.866,45.72 70.942,45.796 76.124,45.796 76.867,46.54 76.879,46.54 77.258,46.161 77.258,43.532 77.216,43.49 J3.6
NetJ3_7: J3.7 U1.79 | length 24
  Top Layer w0.2: U1.79 63.659,48.28 67.722,48.28 v1(68.631,47.371)
  Bottom Layer w0.2: v1(68.631,47.371) 68.482,47.52 66.37,47.52 65.991,47.141 65.991,41.68 66.472,41.199 73.711,41.199 J3.7
NetJ3_8: J3.8 U1.78 | length 15.8
  Top Layer w0.2: U1.78 63.302,47.93 66.704,47.93 67.463,47.17
  Bottom Layer w0.2: 67.463,47.17 67.282,46.988 66.589,46.988 66.589,46.296 66.396,46.102 66.396,44.45 67.107,43.739 70.561,43.739 J3.8
NetJ3_9: J3.9 U1.66 | length 37.3
  Top Layer w0.2: U1.66 57.057,51.943 57.225,51.943 ; 59.953,45.84 60.24,46.126 67.458,46.126 ; J3.9 69.596,44.12 71.12,44.12 73.694,46.694 v1(73.694,47.219)
  Bottom Layer w0.2: 57.225,51.943 57.91,52.629 62.84,52.629 62.84,48.387 60.292,45.84 59.953,45.84 ; 67.458,46.126 69.825,46.126 70.917,47.219 v1(73.694,47.219)
NetJ3_10: J3.10 U1.65 | length 19.3
  Top Layer w0.2: U1.65 54.381,49.974 54.381,47.828 57.48,44.729 64.491,44.729 J3.10
NetJ3_11: J3.11 U1.64 | length 19.9
  Top Layer w0.2: U1.64 55.416,51.871 54.026,50.481 54.026,45.902 55.554,44.374 64.338,44.374 64.516,44.196 J3.11
NetJ3_12: J3.12 U1.63 | length 18.8
  Top Layer w0.2: 52.793,45.517 52.793,49.799 U1.63 ; 58.224,43.109 58.451,43.109 58.856,43.514 60.931,43.514 61.976,42.469 J3.12
  Bottom Layer w0.2: 52.793,45.517 53.301,45.009 56.325,45.009 58.224,43.109
NetJ3_13: J3.13 U1.34 | length 28.5
  Top Layer w0.2: U1.34 58.19,62.941 58.979,62.941 60.935,60.985 61.281,60.985 61.281,58.411 60.477,57.607 v1(60.477,57.074)
  Bottom Layer w0.2: J3.13 59.436,44.458 63.889,48.911 63.889,53.662 v1(60.477,57.074)
NetJ3_14: J3.14 U1.33 | length 32.5
  Top Layer w0.2: 53.579,49.024 53.579,45.72 55.281,44.018 56.896,44.018 J3.14 ; 55.824,66.015 U1.33
  Bottom Layer w0.2: 53.579,49.024 53.922,49.024 54.737,48.209 56.388,48.209 56.388,56.388 56.617,56.617 56.617,65.024 55.626,66.015 55.824,66.015
NetJ3_15: J3.15 U1.18 | length 34.8
  Top Layer w0.2: v1(62.281,51.841) 62.281,53.111 62.456,53.287 62.456,62.998 U1.18
  Bottom Layer w0.2: J3.15 54.356,43.231 52.369,43.231 51.216,44.384 51.216,47.269 51.572,47.625 53.319,47.625 53.782,47.162 57.601,47.162 v1(62.281,51.841)
NetJ3_16: J3.16 U1.17 | length 99.1
  Top Layer w0.2: J3.16 51.816,40.767 v2(65.278,40.767) ; U1.17 66.04,65.875 v1(66.04,66.878) ; v1(77.114,77.292) 78.613,75.794 v1(78.613,72.441) ; v1(81.229,40.767) 81.229,43.485 82.55,44.806 83.82,44.806 87.147,48.133 v1(87.147,69.494)
  Bottom Layer w0.2: v2(65.278,40.767) v1(81.229,40.767) ; v1(66.04,66.878) 66.684,66.878 70.764,70.958 70.764,75.667 72.39,77.292 v1(77.114,77.292) ; v1(78.613,72.441) 84.201,72.441 v1(87.147,69.494)
NetJ3_17: J3.17 U1.16 | length 37.7
  Top Layer w0.2: 63.403,52.559 63.403,62.531 U1.16
  Bottom Layer w0.2: J3.17 49.276,46.482 50.8,48.006 54.102,48.006 54.305,47.803 56.871,47.803 56.871,52.299 58.355,53.783 63.273,53.783 63.403,53.653 63.403,52.559
NetJ3_18: J3.18 U1.15 | length 35.7
  Top Layer w0.2: J3.18 46.736,43.383 47.625,44.272 50.317,44.272 51.13,45.085 51.13,46.306 52.059,47.235 ; v1(62.018,50.258) 62.577,50.258 64.063,51.744 64.063,62.484 U1.15
  Bottom Layer w0.2: 52.059,47.235 52.612,47.235 53.061,46.787 57.937,46.787 61.408,50.258 v1(62.018,50.258)
NetJ3_19: J3.19 U1.54 | length 19.2
  Top Layer w0.2: J3.19 44.196,43.815 45.009,44.628 49.632,44.628 50.724,45.72 50.724,51.547 51.524,52.347 51.524,54.895 U1.54
NetJ3_20: J3.20 U1.53 | length 21
  Top Layer w0.2: J3.20 41.656,43.459 42.006,43.459 43.53,44.983 48.692,44.983 50.292,46.584 50.292,52.043 51.174,52.924 51.174,55.096 51.682,55.605 U1.53
NetJ3_21: J3.21 U1.52 | length 20.9
  Top Layer w0.2: 49.835,50.749 49.835,52.132 50.744,53.042 50.744,55.529 U1.52
  Bottom Layer w0.2: J3.21 39.827,42.164 39.827,43.18 47.396,50.749 49.835,50.749
NetJ3_22: J3.22 U1.51 | length 28.7
  Top Layer w0.2: 50.214,55.197 50.214,56.467 U1.51
  Bottom Layer w0.2: J3.22 36.576,52.222 36.627,52.273 50.214,52.273 50.214,55.197
NetJ3_23: J3.23 U1.47 | length 46.3
  Top Layer w0.2: v1(50.775,67.818) 50.775,61.165 U1.47
  Bottom Layer w0.2: J3.23 34.036,53.34 37.015,56.319 45.985,56.319 45.985,56.983 49.201,60.199 49.201,66.244 v1(50.775,67.818)
NetJ3_24: J3.24 U1.96 | length 82.4
  Top Layer w0.2: J3.24 31.496,43.307 35.56,47.371 36.83,47.371 38.71,49.251 38.71,50.521 39.319,50.521 ; 54.739,49.566 54.739,48.563 58.162,45.14 66.716,45.14 66.752,45.103 ; 67.322,58.303 67.322,56.638 U1.96 ; v1(76.708,45.085) 77.419,45.796 81.093,45.796 81.285,45.604
  Bottom Layer w0.2: 39.319,50.521 40.507,51.709 52.597,51.709 54.739,49.566 ; 66.752,45.103 66.77,45.085 v1(76.708,45.085) ; 67.322,58.303 67.566,58.303 67.566,57.54 69.349,57.54 81.285,45.604
NetJ3_25: J3.25 U1.95 | length 50
  Top Layer w0.2: v1(68.123,50.927) 69.393,52.197 69.393,53.86 U1.95
  Bottom Layer w0.2: J3.25 28.956,41.199 60.401,41.199 60.401,43.205 v1(68.123,50.927)
NetJ3_26: J3.26 U1.93 | length 133.2
  Top Layer w0.2: v1(26.568,63.957) 26.568,72.466 27.864,73.762 27.864,77.191 30.48,79.807 79.781,79.807 83.388,76.2 83.388,69.672 v1(80.848,67.132) ; U1.93 68.667,53.172 67.573,52.078 67.573,50.377 71.002,50.377 71.628,51.003 71.628,52.941 71.405,53.164 71.405,57.461
  Bottom Layer w0.2: J3.26 26.416,53.086 25.806,53.696 25.806,63.195 v1(26.568,63.957) ; 71.405,57.461 80.848,66.904 v1(80.848,67.132)
NetPUSB1_2: PUSB1.2 R5.2 | length 3.4
  Top Layer w0.2: PUSB1.2 31.389,58.505 R5.2
NetPUSB1_3: PUSB1.3 R4.2 | length 3.1
  Top Layer w0.2: PUSB1.3 30.759,57.855 30.829,57.785 R4.2
NetR2_2: R2.2 SW1.2 U1.14 | length 74.2
  Top Layer w0.2: U1.14 65.126,62.84 65.126,62.357 66.421,61.062 66.421,58.674 68.732,58.674 69.494,57.912 71.755,57.912 71.755,53.442 72.009,53.188 R2.2 71.399,49.022 v1(70.942,48.565)
  Bottom Layer w0.2: SW1.2 28.702,43.815 27.991,43.104 27.991,41.275 28.956,40.31 60.325,40.31 60.96,40.945 60.96,43.038 66.487,48.565 v1(70.942,48.565)
NetR3_2: R3.2 SW2.1 U1.94 | length 113.8
  Top Layer w0.2: R3.2 46.609,54.331 v1(42.697,58.242) 42.697,48.336 40.335,45.974 40.335,39.37 41.656,38.049 77.495,38.049 80.721,41.275 80.721,44.069 v1(80.315,44.475) ; v1(67.158,55.778) 67.158,55.388 U1.94
  Bottom Layer w0.2: SW2.1 32.002,64.683 38.011,58.674 42.266,58.674 v1(42.697,58.242) ; v1(67.158,55.778) 69.304,55.778 80.315,44.768 v1(80.315,44.475)
pads on no net: PUSB1.SH1 PUSB1.SH2 PUSB1.SH3 PUSB1.SH4 PUSB1.SH5 PUSB1.SH6 PUSB1.SH7 PUSB1.SH8 PUSB1.SH9 PUSB1.SH10 U1.1 U1.2 U1.3 U1.4 U1.5 U1.38 U1.39 U1.40 U1.41 U1.42 U1.43 U1.44 U1.45 U1.46 U1.55 U1.56 U1.57 U1.58 U1.59 U1.60 U1.61 U1.62 U1.81 U1.82 U1.83 U1.84 U1.85 U1.86 U1.87 U1.88 U1.97 U1.98

## Polygon pours and split planes (outlines as drawn)
GND on Bottom Layer "GND_L02_P003" (solid, pour order 3): 91.186,80.391 91.186,37.084 25.273,37.084 25.273,80.518
GND on Bottom Layer "NONET_L02_P000" (solid, shelved, pour order 0): 25.146,40.767 91.313,40.767 91.313,76.708 25.273,76.708

## Text inside footprints (layer, text, board x,y; h text height)
PUSB1: Mechanical 13 "PCB EDGE" at 24.87,55.155 h0.8 r90